# Altium PCB PCB_CL-IR-01.PcbDoc
Units mil, origin at the board's own origin, x right, y up, seen from the top; angles counter-clockwise.
Board outline 3470 x 1720 mil, 2 copper layers (Top Layer, Bottom Layer); 35 components, 20 nets, 86 pads, 42 vias.
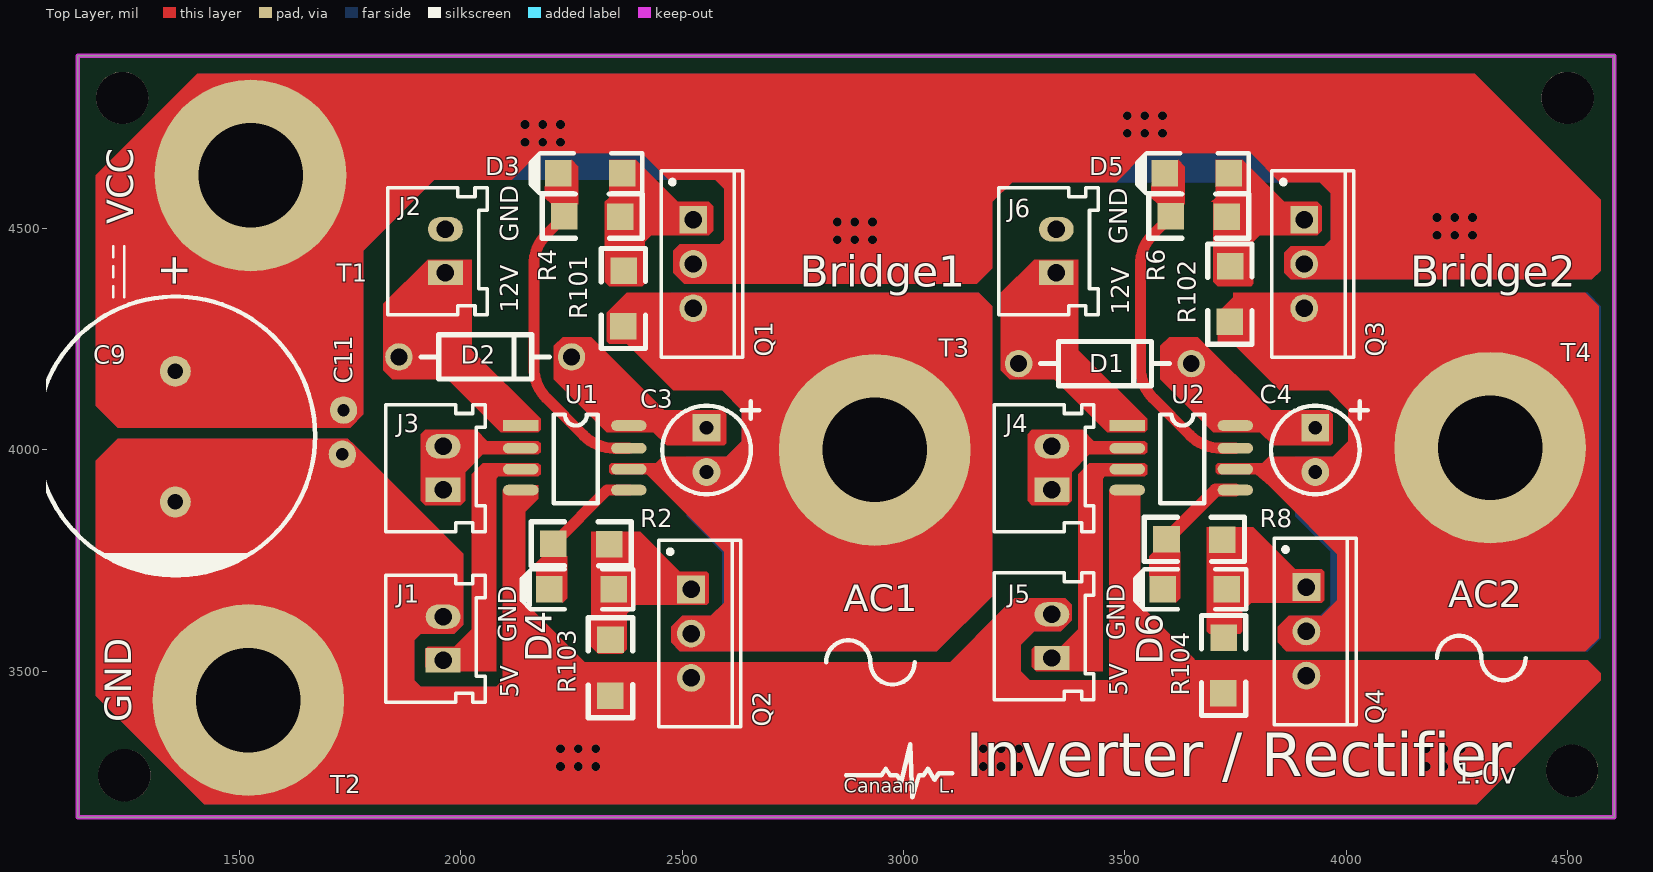
[diagram p0: Top Layer view]
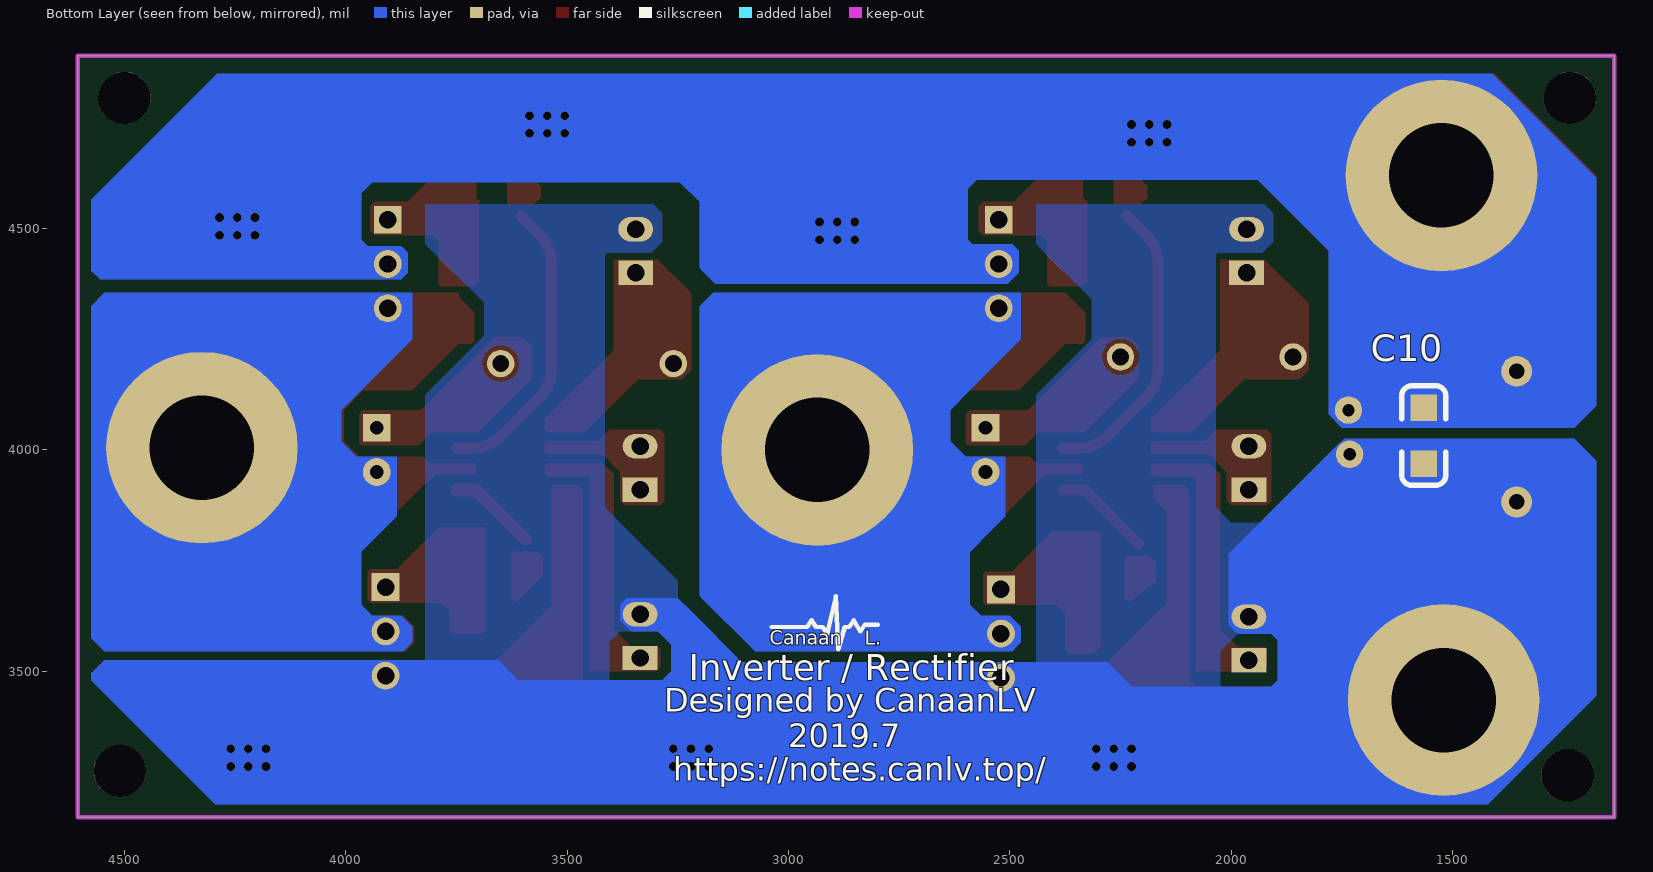
[diagram p1: Bottom Layer view, seen from below]
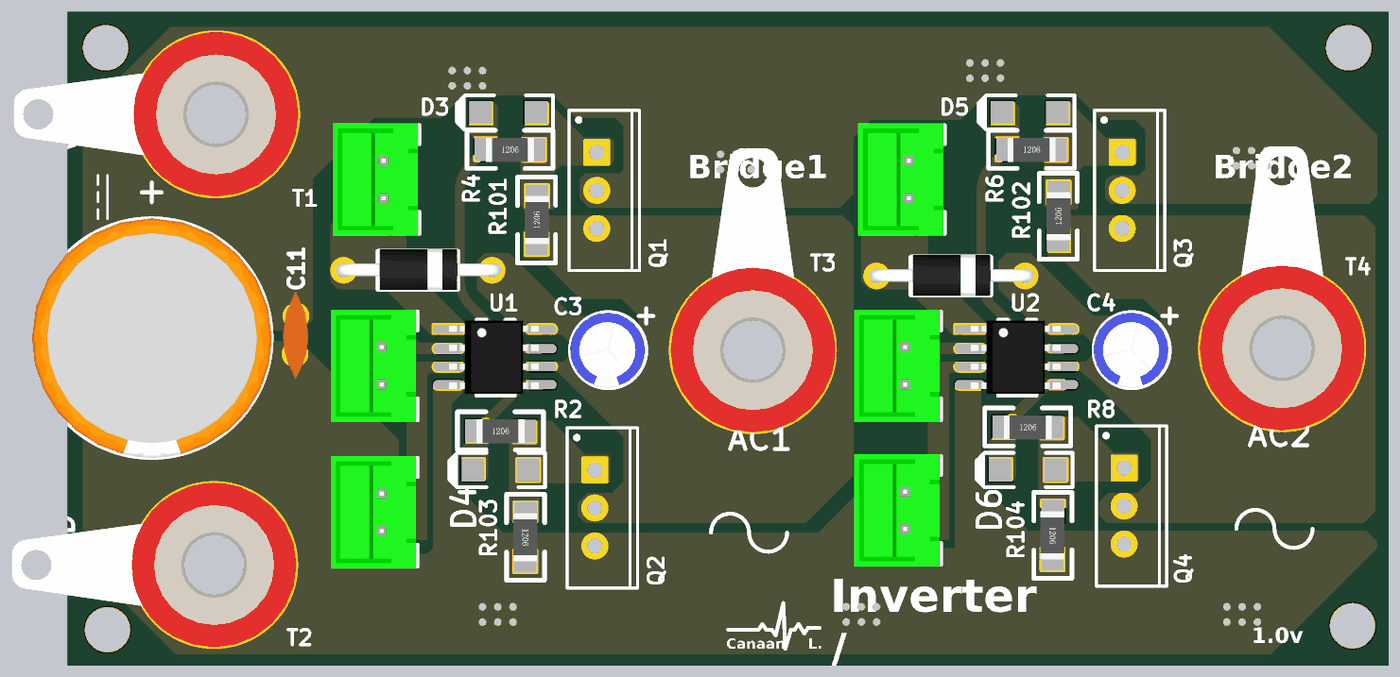
[diagram p2: 3D render of the assembled board from above, using the file's embedded part models]

## Layer stack, top to bottom
Top Solder: solder mask 0.4, Solder Resist, Dk 3.5
Top Layer: signal copper 1.4
Dielectric 1: dielectric 12.6, FR-4, Dk 4.8
Bottom Layer: signal copper 1.4
Bottom Solder: solder mask 0.4, Solder Resist, Dk 3.5

## Board outline
1135,3170 4605,3170 4605,4890 1135,4890

## Design rules (kind name [scope] priority, off if disabled: settings)
Clearance [All] p1: gap=10
PolygonConnect [All] p1: connectstyle=Direct reliefconductorwidth=10 reliefentries=4 polygonreliefangle="90 Angle" airgapwidth=10
RoomDefinition Sheet_CL-IR-01 [InComponentClass('Sheet2')] p1: confinementstyle=ConfineIn formatcopy=TRUE lockcomponents=FALSE outline 950,3135 4650,3135 4650,4920 950,4920
RoutingVias [All] p1: holewidth=28 width=50 viastyle="Through Hole" minholewidth=28 minwidth=50 maxholewidth=28 maxwidth=50
SolderMaskExpansion [All] p1: expansion=4
Width [All] p1: maxlimit=500 minlimit=10 preferedwidth=30
30 further rules are at their usual default settings.

## Components (designator, comment, footprint, x,y, rotation, side; value= is the part's Value field where it differs from the comment)
C3 "Cap2" CZ0.50/25V47U 2555,4050 r180 top
C4 "Cap2" CZ0.50/25V47U 3930,4050 r180 top
C9 "电解电容" CZ16X25 1355,4030 r90 top
C10 "普通电容" C1206 1565,4095 r270 bottom
C11 "uF" C0.254 1735,4040 r270 top
D1 "DO-41" DO-41-2 3455,4195 r0 top
D2 "DO-41" DO-41-2 2055,4210 r0 top
D3 "0805D" 0805D 2295,4625 r180 top
D4 "0805D" 0805D 2275,3685 r180 top
D5 "0805D" 0805D 3665,4625 r180 top
D6 "0805D" 0805D 3660,3685 r180 top
J1 "SIP-2" 2.54XH接插件2P 1960,3525 r90 top
J2 "SIP-2" 2.54XH接插件2P 1965,4400 r90 top
J3 "SIP-2" 2.54XH接插件2P 1960,3910 r90 top
J4 "SIP-2" 2.54XH接插件2P 3335,3910 r90 top
J5 "SIP-2" 2.54XH接插件2P 3335,3530 r90 top
J6 "SIP-2" 2.54XH接插件2P 3345,4400 r90 top
Q1 "IRF540N" TO-220AB 2525,4420 r270 top
Q2 "IRF540N" TO-220AB 2520,3585 r270 top
Q3 "IRF540N" TO-220AB 3905,4420 r270 top
Q4 "IRF540N" TO-220AB 3910,3590 r270 top
R2 "" R1206 2280,3785 r0 top
R4 "" R1206 2305,4525 r0 top
R6 "" R1206 3675,4525 r0 top
R8 "" R1206 3665,3795 r0 top
R101 "" R1206 2370,4350 r90 top
R102 "" R1206 3740,4360 r90 top
R103 "" R1206 2335,3500 r270 top
R104 "" R1206 3720,3505 r270 top
T1 "" 香蕉接线柱Red_6mm 1525,4620 r90 top
T2 "" 香蕉接线柱Red_6mm 1520,3435 r90 top
T3 "" 香蕉接线柱Red_6mm 2935,4000 r0 top
T4 "" 香蕉接线柱Red_6mm 4325,4005 r0 top
U1 "IR2104" SOP8 2260,3980 r0 top
U2 "IR2104" SOP8 3630,3980 r0 top

## Footprints (in the part's own frame and the unit in brackets; to place one, negate y for a bottom-side part, rotate by r counter-clockwise, add the part's x,y. Pads: shape width x height; smd on the part's side, far side on the other; paste and mask are expansions set on the pad)
2.54XH接插件2P [mm]
  rect 1.4x2 hole 1: 1(0,0)
  oval 1.4x2 hole 1: 2(2.5,0)
  silkscreen extent -2.41,-2.41 4.88,3.3, body extent -2.51,-2.3 4.99,3.4, height 7
0805D [mil]
  rect 60x60 smd: A(-70,0) K(75,0)
  silkscreen extent -114,-45 137,45, body extent -60,-29 70,30, height 39
C0.254 [mil]
  round 62 hole 28: 1(-50,0) 2(50,-2.5)
  body extent -115,-34 115,33, height 233
C1206 [mil] "3216/A型"
  rect 60x60 smd: 1(0,0) 2(126,0)
  silkscreen extent -50,-50 175,50, body extent 0,-31 126,32, height 39
CZ0.50/25V47U [mm]
  rect 1.6x1.6 hole 0.8: 1(0,0)
  round 1.6 hole 0.8: 2(0,2.54)
  silkscreen extent -3.02,-1.52 2.54,3.81, body extent -2.45,-1.23 2.54,3.77, height 7.3
CZ16X25 [mil]
  round 70 hole 35: 1(147.64,0) 2(-147.64,0)
  silkscreen extent -313,-316 316,314, body extent -313,-317 317,313, height 984
DO-41-2 [mil]
  round 62 hole 38: A(-195,0) K(195,0)
  silkscreen extent -145,-50 145,50, body extent -215,-52 219,55, height 107
R1206 [mil] "1/4W"
  rect 60x60 smd: 1(-71,3) 2(55,2)
  silkscreen extent -121,-47 105,53, body extent -71,-29 55,33, height 24
SOP8 [mil]
  rect 80x24 smd: 1(-124.68,75)
  oval 80x24 smd: 2(-124.68,23.82) 3(-124.68,-23.43) 4(-124.68,-70.67) 5(119.41,-70.67) 6(119.41,-23.43) 7(119.41,23.82) 8(119.41,75)
  silkscreen extent -51,-100 49,100, body extent -123,-95 113,98, height 63
TO-220AB [mm] "TO, Thru-Hole, Vertical, Heatsink Mounted; 3 In-Line Leads; Pitch 2.54 mm"
  rect 1.6x1.6 hole 1: 1(-2.54,0)
  round 1.6 hole 1: 2(0,0) 3(2.54,0)
  silkscreen extent -5.35,-1.85 5.35,2.85, body extent -5.4,-1.9 5.4,2.9, height 19.3
香蕉接线柱Red_6mm [mm]
  round 11 hole 6: 1(0,0)
  body extent -5.5,-5.5 5.5,13.5, height 9

## Part data
C3 C4 C9 C10: "Capacitor"
C11: library part C直插无极性
Q1 Q2 Q3 Q4: "HEXFET Power MOSFET"
R2 R4 R6 R8 R101 R102 R103 R104: library part Res1, "Resistor"
T1 T2 T3 T4: library part TEST_I
U1 U2: library part Component_1

## Free pads (board coordinates)
  round 118.11 hole 118.11: 0(1235,4795) 1(4500,4795) 2(4510,3275) 3(1240,3265)

## Via types
v1: diameter 19.68, hole 19.68, Top Layer to Bottom Layer, tented both sides, 42 vias

## Nets (pads, with @x,y where several pads share a name; then routed paths per layer and width w, separated by ;. In a path a pad name is that pad's centre, name@x,y a point inside that pad or via, vN(x,y) a via of type N, cw(c..) or ccw(c..) an arc to the next point about the centre after c; other vN are vias at no path point)
AC+: C3.2 Q1.3 Q2.2 R101.1 T3.1 U1.6
AC-: C4.2 Q3.3 Q4.2 R102.1 T4.1 U2.6
GND: C9.2 C10.2 C11.2 J1.2 J2.2 J5.2 J6.2 Q2.3 Q4.3 R103.2 R104.2 T2.1 U1.4 U2.4
  other v1: 2225,3285 2265,3285 2305,3285 3180,3285 3220,3285 3260,3285 4180,3285 4220,3285 4260,3285 2225,3325 2265,3325 2305,3325 3180,3325 3220,3325 3260,3325 4180,3325 4220,3325 4260,3325
NetC3_1: C3.1 D2.K U1.8
NetC4_1: C4.1 D1.K U2.8
NetD3_A: D3.A Q1.1 R4.2 R101.2
NetD4_A: D4.A Q2.1 R2.2 R103.1
NetD5_A: D5.A Q3.1 R6.2 R102.2
NetD6_A: D6.A Q4.1 R8.2 R104.1
PWM_1: J3.1 J3.2 U1.2
PWM_2: J4.1 J4.2 U2.2
PWM_H1: D3.K R4.1 U1.7 | length 671.6
  Top Layer w25: R4.1 2194.29,4488.29 ccw(c2265,4417.58) 2165,4417.58 2165,4186.42 ccw(c2265,4186.42) 2194.29,4115.71 2276.89,4033.11 ccw(c2347.6,4103.82) 2347.6,4003.82 U1.7
PWM_H2: D5.K R6.1 U2.7 | length 671.6
  Top Layer w25: R6.1 3564.29,4488.29 ccw(c3635,4417.58) 3535,4417.58 3535,4186.42 ccw(c3635,4186.42) 3564.29,4115.71 3646.89,4033.11 ccw(c3717.6,4103.82) 3717.6,4003.82 U2.7
PWM_L1: D4.K R2.1 U1.5 | length 220.7
  Top Layer w25: R2.1 2330.33,3909.33 U1.5
PWM_L2: D6.K R8.1 U2.5 | length 201.5
  Top Layer w30: R8.1 3705.33,3909.33 U2.5
VCC: C9.1 C10.1 C11.1 Q1.2 Q3.2 T1.1
  other v1: 2850,4475 2890,4475 2930,4475 4205,4485 4245,4485 4285,4485 2850,4515 2890,4515 2930,4515 4205,4525 4245,4525 4285,4525 2145,4695 2185,4695 2225,4695 3505,4715 3545,4715 3585,4715 2145,4735 2185,4735 2225,4735 3505,4755 3545,4755 3585,4755
VCC5V: J1.1 U1.3
VCC5V1: J5.1 U2.3
VCC12V: D2.A J2.1 U1.1
VCC12V1: D1.A J6.1 U2.1

## Polygon pours and split planes (outlines as drawn)
GND on Bottom Layer "GND_L02_P000" (solid, remove dead copper, pour order 0): 1925,4555 1905,4535 1905,4505 1905,4470 1930,4445 2030,4445 2035,4440 2035,3870 2000,3835 1735,3835 2025,3545 2025,3455 2375,3455 2440,3520 2440,4125 2315,4250 2315,4340 2440,4465 2440,4555
GND on Bottom Layer "GND_L02_P002" (solid, remove dead copper, pour order 2): 3305,4555 3285,4535 3285,4505 3285,4470 3310,4445 3410,4445 3415,4440 3415,3870 3250,3705 3250,3665 3325,3590 3380,3590 3405,3565 3405,3455 3755,3455 3820,3520 3820,4125 3687.5,4257.5 3687.5,4332.5 3820,4465 3820,4555

## Keep-outs
Keep-Out Layer:
  the board outline again, w10

## Other copper
Top Layer:
  region net PWM_L2: 3625,3770 3625,3665 3615,3655 3555,3715 3555,3760 3565,3770
  region net PWM_L1: 2230,3655 2240,3665 2240,3760 2185,3760 2170,3745 2170,3705
  region net PWM_H2: 3620,4655 3635,4640 3635,4555 3575,4555 3560,4570 3560,4595
  region net NetD5_A: 3765,4655 3860,4560 3695,4560 3705,4570 3705,4655
  region net NetD3_A: 2395,4655 2490,4560 2325,4560 2335,4570 2335,4655
  region net PWM_H1: 2250,4655 2265,4640 2265,4555 2205,4555 2190,4570 2190,4595
  region net VCC: 1405,4850 1175,4620 1175,4100 1225,4050 1750,4050 1780,4080 1780,4850
  region net GND: 1225,4025 1175,3975 1175,3445 1420,3200 1760,3200 1760,4010 1745,4025
  region net NetD3_A: 2325,4560 2325,4380 2335,4370 2410,4370 2415,4375 2415,4470 2430,4485 2560,4485 2570,4495 2570,4550 2560,4560
  region net AC+: 2330,4310 2375,4355 2560,4355 2570,4345 2570,4280 2530,4240 2335,4240 2330,4245
  region net NetC3_1: 2295,4255 2460,4090 2590,4090 2600,4080 2600,4015 2595,4010 2465,4010 2435,4040 2330,4040 2210,4160 2210,4235 2230,4255
  region net AC+: 2340,3970 2335,3965 2335,3950 2340,3945 2465,3945 2495,3915 2590,3915 2600,3925 2600,3975 2590,3985 2455,3985 2440,3970
  region net VCC12V: 1925,4430 1825,4330 1825,4180 1845,4160 1970,4160 2090,4040 2175,4040 2180,4045 2180,4070 2025,4225 2025,4430
  region net PWM_1: 1920,4045 1910,4035 1910,3885 1920,3875 2000,3875 2010,3885 2010,3950 2050,3990 2175,3990 2180,3995 2180,4015 2175,4020 2060,4020 2035,4045
  region net NetD4_A: 2295,3815 2295,3555 2310,3540 2365,3540 2375,3550 2375,3630 2395,3650 2555,3650 2560,3655 2560,3720 2555,3725 2495,3725 2405,3815
  region net VCC5V: 2175,3970 2180,3965 2180,3945 2175,3940 2085,3940 2080,3935 2080,3500 1930,3500 1920,3510 1920,3550 1925,3555 1985,3555 2025,3595 2025,3945 2050,3970
  region net AC+: 2455,3985 2600,3985 2635,4020 2635,4190 2670,4225 3165,4225 3200,4190 3200,3770 3170,3740 2625,3740 2455,3910 2420,3945
  region net AC+: 2375,4355 3170,4355 3200,4325 3200,4190 3100,4090 2635,4090 2590,4135 2480,4135 2375,4240
  region net AC+: 2475,3600 2500,3625 2565,3625 2595,3655 2595,3770 3200,3770 3200,3670 3075,3545 2495,3545 2475,3565
  region net VCC: 1780,4850 4290,4850 4575,4565 4575,4405 4555,4385 3875,4385 3860,4400 3860,4445 3875,4460 3950,4460 3965,4475 3965,4580 3940,4605 3850,4605 3785,4670 3545,4670 3480,4605 3245,4605 3200,4560 3200,4410 3165,4375 2505,4375 2480,4400 2480,4450 2495,4465 2585,4465 2595,4475 2595,4590 2575,4610 2470,4610 2410,4670 2175,4670 2115,4610 1940,4610 1780,4450
  region net NetD5_A: 3700,4560 3700,4380 3710,4370 3785,4370 3790,4375 3790,4470 3805,4485 3935,4485 3945,4495 3945,4550 3935,4560
  region net AC-: 3710,4310 3755,4355 3940,4355 3950,4345 3950,4280 3910,4240 3715,4240 3710,4245
  region net NetC4_1: 3665,4255 3830,4090 3960,4090 3970,4080 3970,4015 3965,4010 3835,4010 3805,4040 3700,4040 3580,4160 3580,4235 3600,4255
  region net VCC12V1: 3295,4430 3220,4355 3220,4180 3240,4160 3340,4160 3460,4040 3545,4040 3550,4045 3550,4070 3395,4225 3395,4430
  region net PWM_2: 3290,4045 3280,4035 3280,3885 3290,3875 3370,3875 3380,3885 3380,3950 3420,3990 3545,3990 3550,3995 3550,4015 3545,4020 3430,4020 3405,4045
  region net AC-: 3845,3600 3870,3625 3945,3625 3980,3660 3980,3770 4570,3770 4570,3575 4540,3545 3865,3545 3845,3565
  region net AC-: 3745,4355 4540,4355 4570,4325 4570,4190 4470,4090 4005,4090 3960,4135 3850,4135 3745,4240
  region net AC-: 3825,3985 3970,3985 4005,4020 4005,4190 4040,4225 4535,4225 4570,4190 4570,3770 4540,3740 4005,3740 3825,3920 3795,3945
  region net AC-: 3710,3970 3705,3965 3705,3950 3710,3945 3835,3945 3865,3915 3960,3915 3970,3925 3970,3975 3960,3985 3825,3985 3810,3970
  region net NetD6_A: 3685,3825 3685,3590 3690,3585 3760,3585 3765,3590 3765,3635 3785,3655 3945,3655 3950,3660 3950,3725 3945,3730 3885,3730 3790,3825
  region net VCC5V1: 3545,3970 3550,3965 3550,3945 3545,3940 3455,3940 3450,3935 3450,3500 3300,3500 3290,3510 3290,3550 3295,3555 3355,3555 3395,3595 3395,3945 3420,3970
  region net GND: 2105,3920 2095,3910 2095,3480 2080,3465 2225,3465 2280,3520 2145,3655 2145,3860 2175,3890 2175,3920
  region net GND: 3475,3920 3465,3910 3465,3480 3450,3465 3595,3465 3657.5,3527.5 3535,3650 3535,3920
  region net GND: 1760,4010 2005,3765 2005,3605 1985,3585 1910,3585 1895,3570 1895,3480 1910,3465 2225,3465 2280,3520 3105,3520 3220,3635 3250,3665 3365,3665 3380,3650 3380,3615 3355,3590 3295,3590 3265,3560 3265,3500 3285,3480 3610,3480 3655,3525 4545,3525 4575,3495 4575,3480 4295,3200 1760,3200
Bottom Layer:
  region net VCC: 1410,4850 1175,4615 1175,4100 1225,4050 1750,4050 1780,4080 1780,4850
  region net GND: 1225,4025 1175,3975 1175,3445 1420,3200 1760,3200 1760,4010 1745,4025
  region net AC+: 2510,3985 2600,3985 2635,4020 2635,4190 2670,4225 3165,4225 3200,4190 3200,3770 3170,3740 2620,3740 2510,3850
  region net AC+: 2475,4355 3170,4355 3200,4325 3200,4190 3100,4090 2635,4090 2590,4135 2475,4250
  region net AC+: 2475,3600 2500,3625 2565,3625 2590,3650 2590,3770 3200,3770 3200,3670 3075,3545 2495,3545 2475,3565
  region net VCC: 1780,4850 4290,4850 4575,4565 4575,4405 4555,4385 3875,4385 3860,4400 3860,4445 3875,4460 3950,4460 3965,4475 3965,4580 3940,4605 3245,4605 3200,4560 3200,4410 3165,4375 2505,4375 2480,4400 2480,4450 2495,4465 2585,4465 2595,4475 2595,4590 2575,4610 1940,4610 1780,4450
  region net AC-: 3850,3600 3875,3625 3940,3625 3965,3650 3965,3770 4575,3770 4575,3575 4545,3545 3870,3545 3850,3565
  region net AC-: 3850,4355 4545,4355 4575,4325 4575,4190 4475,4090 4010,4090 3965,4135 3850,4250
  region net AC-: 3885,3985 3975,3985 4010,4020 4010,4190 4045,4225 4540,4225 4575,4190 4575,3770 4545,3740 3995,3740 3885,3850
  region net GND: 1760,4010 2005,3765 2005,3605 1985,3585 1910,3585 1895,3570 1895,3480 1910,3465 2225,3465 2280,3520 3105,3520 3220,3635 3250,3665 3365,3665 3380,3650 3380,3615 3355,3590 3295,3590 3265,3560 3265,3500 3285,3480 3610,3480 3655,3525 4545,3525 4575,3495 4575,3480 4295,3200 1760,3200

## Silkscreen, mask and mechanical layers (free items; w line width, h text height)
Top Overlay:
  lines w6: 1215,4345 1215,4370 ; 1215,4390 1215,4415 ; 1215,4435 1215,4460 ; 1240,4345 1240,4460
  lines w10: 2825,3520 cw(c2875,3520) 2925,3520 ccw(c2975,3520) 3025,3520 ; 2870,3265 2950,3265 2960,3280 2970,3265 2985,3265 2995,3250 3015,3335 3020,3215 3035,3265 3045,3265 3055,3280 3070,3255 3080,3270 3110,3270 ; 4205,3530 cw(c4255,3530) 4305,3530 ccw(c4355,3530) 4405,3530
  text "VCC" at 1260,4510 h60 r90
  text "GND" at 2130,4470 h40 r90
  text "GND" at 3505,4465 h40 r90
  text "Bridge1" at 2765,4345 h120
  text "Bridge2" at 4145,4345 h120
  text "12V" at 2130,4310 h40 r90
  text "12V" at 3510,4305 h40 r90
  text "AC2" at 4230,3645 h60
  text "AC1" at 2865,3635 h60
  text "GND" at 3500,3570 h40 r90
  text "GND" at 2125,3565 h40 r90
  text "5V" at 3505,3445 h40 r90
  text "5V" at 2130,3440 h40 r90
  text "GND" at 1255,3385 h60 r90
  text "Inverter / Rectifier" at 3140,3230 h170
  text "1.0v" at 4245,3230 h80
  text "Canaan" at 2865,3215 h53
  text "L." at 3080,3215 h53
Bottom Overlay:
  lines w10: 2797.71,3605 2827.71,3605 2837.71,3590 2852.71,3615 2862.71,3600 2872.71,3600 2887.71,3550 2892.71,3670 2912.71,3585 2922.71,3600 2937.71,3600 2947.71,3615 2957.71,3600 3037.71,3600
  text "L." at 2827.71,3550 h53
  text "Canaan" at 3042.71,3550 h53
  text "Inverter / Rectifier" at 3225,3460 h100
  text "Designed by CanaanLV" at 3280,3390 h90
  text "2019.7" at 3000,3310 h90
  text "https://notes.canlv.top/" at 3260,3235 h90

## Text inside footprints (layer, text, board x,y; h text height)
C9: Top Overlay "+" at 1383,4365.64 h68.9 r90